# Altium PCB esquema.PcbDoc
Units mil, origin at the board's own origin, x right, y up, seen from the top; angles counter-clockwise.
Board outline 7310 x 1730 mil, 2 copper layers (Top, Bottom), stack 61.811 mil thick; 27 components, 33 nets, 105 pads, 26 vias.
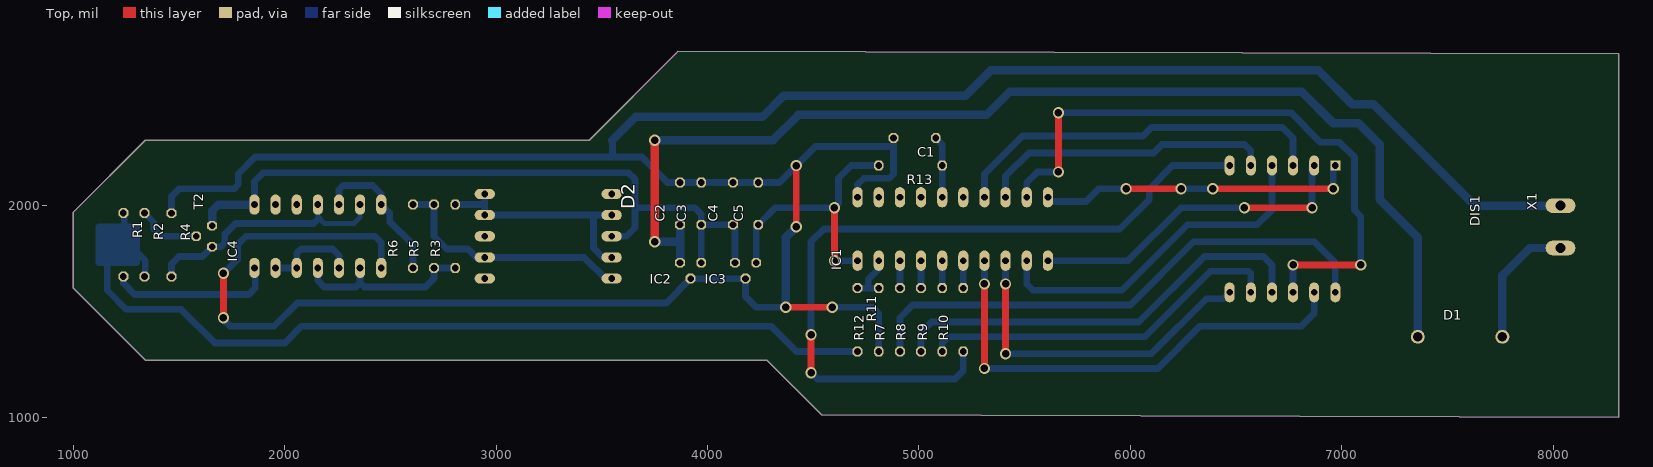
[diagram p0: Top view]
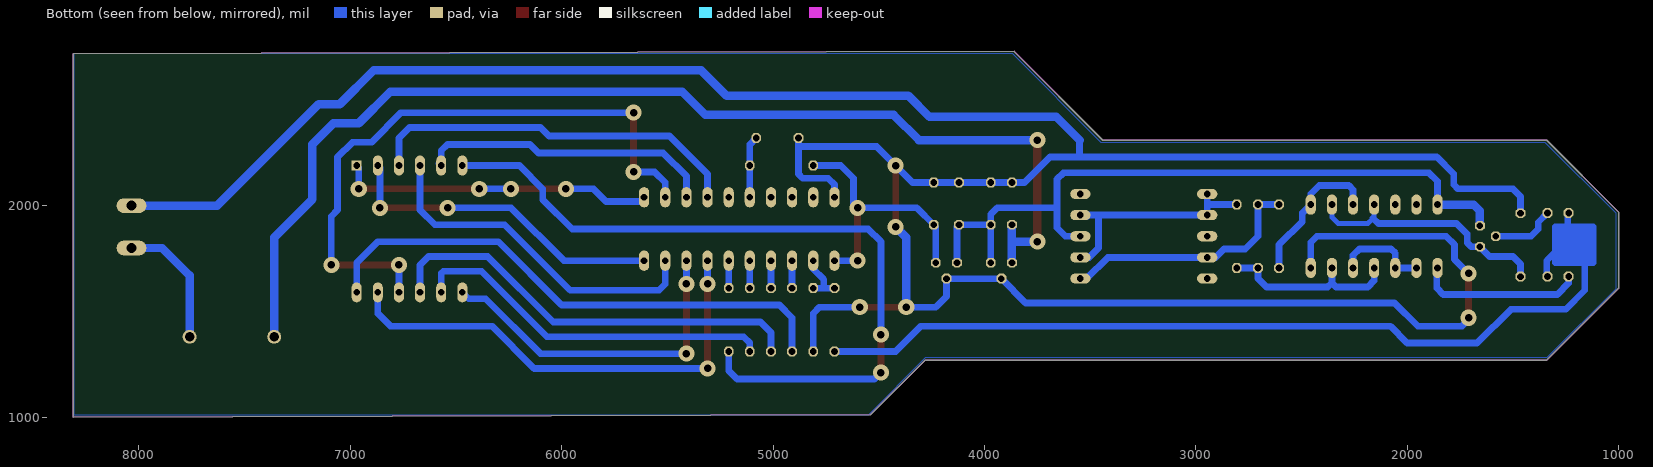
[diagram p1: Bottom view, seen from below]

## Layer stack, top to bottom
Top Solder: solder mask 0.4, Solder Resist, Dk 3.5
Top: signal copper 1.378
Dielectric 1: core 59.0551, FR-4, Dk 4.8
Bottom: signal copper 1.378
Bottom Solder: solder mask 0.4, Solder Resist, Dk 3.5

## Board outline
3860,2730 3440,2310 1340,2310 1000,1970 1000,1610 1340,1270 4280,1270 4540,1010 8310,1000 8310,2720

## Design rules (kind name [scope] priority, off if disabled: settings)
Clearance [All] p1: gap=8 ignorepadtopadclearanceinfootprint=FALSE except(0: SMDPad-SMDPad SMDPad-THPad SMDPad-Via)
Clearance "Clearance (Same Net)" [All] p2: gap=0 ignorepadtopadclearanceinfootprint=FALSE except(8: SMDPad-SMDPad SMDPad-THPad SMDPad-Via)
HoleSize HoleSize_1 [All] p1: absolutevalues=TRUE maxlimit=100000 minlimit=24 maxpercent=80.000 minpercent=20.000
HoleSize [All] p2: absolutevalues=TRUE maxlimit=100 minlimit=1 maxpercent=80.000 minpercent=20.000
HoleToHoleClearance mdViaViaSameLayer [All] p1: gap=8 allowstackedmicrovias=TRUE
HoleToHoleClearance [All] p2: gap=10 allowstackedmicrovias=TRUE
PasteMaskExpansion mlMinCreamFrame [All] p1: expansion=0
PasteMaskExpansion [All] p2: expansion=0
PolygonConnect ThermalVias [IsVia] p1: connectstyle=Direct reliefconductorwidth=10 reliefentries=4 polygonreliefangle="90 Angle" airgapwidth=10
PolygonConnect [All] p2: connectstyle=Relief reliefconductorwidth=10 reliefentries=4 polygonreliefangle="90 Angle" airgapwidth=10
RoutingVias [All] p1: holewidth=28 width=50 viastyle="Through Hole" minholewidth=28 minwidth=50 maxholewidth=28 maxwidth=50
SilkToSilkClearance [All] p1 off: silktosilkclearance=10
SilkToSolderMaskClearance [IsPad] p1 off: minsilkscreentomaskgap=10 clearancetoexposedcopper=TRUE
SolderMaskExpansion mlMinStopFrame [All] p1: expansion=4
SolderMaskExpansion [All] p2: expansion=4
Width Width_1 [All] p1: maxlimit=100000 minlimit=10 preferedwidth=10
Width [All] p2: maxlimit=10 minlimit=10 preferedwidth=10
25 further rules are at their usual default settings.

## Components (designator, comment, footprint, x,y, rotation, side; value= is the part's Value field where it differs from the comment)
C1 "1nF" C050-024X044 4980,2320 r180 top
C2 "0.33uF" C050-024X044 3870,2010 r90 top
C3 "0.1uF" C050-024X044 3970,2010 r90 top
C4 "0.33uF" C050-024X044 4120,2010 r90 top
C5 "0.1uF" C050-024X044 4240,2010 r90 top
D1 "1N4004" DO41-10 7560,1380 r0 top
D2 "" 7SEG-13 3246.3,1855.59 r270 top
DIS1 "NFD-5641BS" NFD-5641 6720,1890 r180 top
IC1 "" SOCKET-20 5160,1890 r0 top
IC2 "78L05Z" TO92#1 3920,1730 r180 top
IC3 "78L33" TO92#1 4180,1730 r180 top
IC4 "74LS04N" DIL14 2156.3,1855.59 r0 top
R1 "1K" 0207/7 1236.3,1815.59 r270 top
R2 "10K" 0207/7 1336.3,1815.59 r270 top
R3 "220" 0207/7 2806.3,1855.59 r90 top
R4 "470" 0207/7 1463.7,1814.41 r270 top
R5 "220" 0207/7 2706.3,1855.59 r90 top
R6 "220" 0207/7 2606.3,1855.59 r90 top
R7 "220" 0207/7 4910,1460 r90 top
R8 "220" 0207/7 5010,1460 r90 top
R9 "220" 0207/7 5110,1460 r90 top
R10 "220" 0207/7 5210,1460 r90 top
R11 "10k" 0207/7 4710,1460 r270 top
R12 "1k" 0207/7 4810,1460 r90 top
R13 "47k" 0207/7 4960,2190 r180 top
T2 "2N3904" TO92#2 1656.3,1855.59 r90 top
X1 "" W237-132 8060,1900 r270 top

## Footprints (in the part's own frame and the unit in brackets; to place one, negate y for a bottom-side part, rotate by r counter-clockwise, add the part's x,y. Pads: shape width x height; smd on the part's side, far side on the other; paste and mask are expansions set on the pad)
7SEG-13 [mil] "7SEG-13"
  oval 48x96 hole 32: 1(-200,-300) 2(-100,-300) 3(0,-300) 4(100,-300) 5(200,-300) 6(200,300) 7(100,300) 8(0,300) 9(-100,300) 10(-200,300)
0207/7 [mil] "0207/7"
  oct 46.48x46.48 hole 32: 1(-150,0) 2(150,0)
C050-024X044 [mil] "C050-024X044"
  oct 46.48x46.48 hole 32: 1(-100,0) 2(100,0)
DIL14 [mil] "DIL14"
  oval 48x96 hole 32: 1(-300,-150) 2(-200,-150) 3(-100,-150) 4(0,-150) 5(100,-150) 6(200,-150) 7(300,-150) 8(300,150) 9(200,150) 10(100,150) 11(0,150) 12(-100,150) 13(-200,150) 14(-300,150)
DO41-10 [mil] "DO41-10"
  round 66 hole 44: A(200,0) C(-200,0)
NFD-5641 [mil] "NFD-5641"
  rect 47.25x47.25 hole 31.5: P$1(-250,-300)
  oval 47.25x94.5 hole 31.5: P$2(-150,-300) P$3(-50,-300) P$4(50,-300) P$5(150,-300) P$6(250,-300) P$7(250,300) P$8(150,300) P$9(50,300) P$10(-50,300) P$11(-150,300) P$12(-250,300)
SOCKET-20 [mil] "SOCKET-20"
  oval 48x96 hole 32: 1(-450,-150) 2(-350,-150) 3(-250,-150) 4(-150,-150) 5(-50,-150) 6(50,-150) 7(150,-150) 8(250,-150) 9(350,-150) 10(450,-150) 11(450,150) 12(350,150) 13(250,150) 14(150,150) 15(50,150) 16(-50,150) 17(-150,150) 18(-250,150) 19(-350,150) 20(-450,150)
TO92#1 [mil] "TO92"
  oct 46.48x46.48 hole 32: 1(-50,0) 2(0,75) 3(50,0)
TO92#2 [mil] "TO92"
  oct 46.48x46.48 hole 32: 1(50,0) 2(0,75) 3(-50,0)
W237-132 [mil] "W237-132"
  oval 70.5x141 hole 47: 1(-100,-25) 2(100,-25)

## Part data
C1 C2 C3 C4 C5: library part C050-024X044
D1: library part DO41-10
D2: library part 7SEG-13
DIS1: library part NFD-5641
IC1: library part SOCKET-20
IC2 IC3 T2: library part TO92
IC4: library part DIL14
R1 R2 R3 R4 R5 R6 R7 R8 R9 R10 R11 R12 R13: library part 0207/7
X1: library part W237-132

## Via types
v1: diameter 53.15/76 (per signal layer), hole 35.43, Top to Bottom, 26 vias

## Nets (pads, with @x,y where several pads share a name; then routed paths per layer and width w, separated by ;. In a path a pad name is that pad's centre, name@x,y a point inside that pad or via, vN(x,y) a via of type N, cw(c..) or ccw(c..) an arc to the next point about the centre after c; other vN are vias at no path point)
+3V3: C5.1 IC1.1 IC3.1 R13.2 | length 1300.4
  Top w32: v1(4600,1740) v1(4600,1990)
  Bottom w32: IC3.1 4230,1900 C5.1 4320,1990 v1(4600,1990) 4620,2010 4620,2130 4680,2190 R13.2 ; v1(4600,1740) IC1.1
GND: C1.2 C2.2 C3.2 C4.2 C5.2 IC1.20 IC2.2 IC3.2 IC4.7 R4.1 R12.1 X1.1 | length 14520.3
  Top w32: v1(1710,1470) v1(1710,1680) ; v1(4370,1520) v1(4590,1520) ; v1(4420,1900) v1(4420,2190)
  Bottom w32: R4.1 1463.7,2043.7 1500,2080 1760,2080 1780,2100 1780,2150 1860,2230 3560,2230 ; v1(1710,1470) 1710,1460 1740,1430 1950,1430 2060,1540 3805,1540 IC2.2 IC3.2 4180,1570 4230,1520 v1(4370,1520) ; v1(1710,1680) 1776.3,1746.3 1776.3,1815.59 1816.3,1855.59 2426.3,1855.59 2456.3,1825.59 IC4.7 ; 3550,2310 3550,2240 3560,2230 ; v1(4590,1520) 4780,1520 4810,1490 R12.1 ; IC1.20 4710,2100 4740,2130 4860,2130 4880,2150 4880,2280 ; C1.2 4880,2280 ; 3560,2230 3690,2230 3810,2110 C2.2 C3.2 C4.2 C5.2 4340,2110 v1(4420,2190) 4510,2280 4880,2280
  Bottom w40: 3550,2310 3660,2420 4260,2420 4360,2520 5220,2520 5340,2640 6890,2640 7050,2480 7150,2480 7630,2000 X1.1 ; v1(4370,1520) 4370,1850 v1(4420,1900)
N$1: C1.1 IC1.16 R13.1 | length 292.4
  Bottom w32: C1.1 5110,2290 R13.1 IC1.16
N$2: IC1.6 R10.2 | length 130
  Bottom w32: R10.2 IC1.6
N$3: IC1.5 R9.2 | length 130
  Bottom w32: R9.2 IC1.5
N$4: IC1.4 R8.2 | length 130
  Bottom w32: R8.2 IC1.4
N$5: IC1.3 R7.2 | length 130
  Bottom w32: R7.2 IC1.3
N$6: IC1.2 R11.1 R12.2 | length 250.7
  Bottom w32: R11.1 4760,1610 ; R12.2 4760,1610 ; IC1.2 4810,1700 4760,1650 4760,1610
N$7: DIS1.P$12 R7.1 | length 2550.5
  Bottom w32: R7.1 4910,1470 4970,1530 6000,1530 6300,1830 6870,1830 6970,1730 DIS1.P$12
N$8: DIS1.P$9 R8.1 | length 2045.7
  Bottom w32: R8.1 5010,1400 5060,1450 6040,1450 6350,1760 6630,1760 6670,1720 DIS1.P$9
N$9: DIS1.P$8 R9.1 | length 1735
  Bottom w32: R9.1 5110,1350 5140,1380 6070,1380 6380,1690 6560,1690 6570,1680 DIS1.P$8
N$10: IC4.1 R1.2 | length 787.4
  Bottom w32: R1.2 1236.3,1633.7 1290,1580 1830,1580 1860,1610 1860,1701.89 IC4.1
N$11: IC4.2 IC4.3 IC4.5 | length 450.7
  Bottom w32: IC4.2 IC4.3 2056.3,1775.59 2076.3,1795.59 2226.3,1795.59 2256.3,1765.59 IC4.5
N$12: IC4.4 IC4.6 R3.1 R5.1 | length 875.6
  Bottom w32: IC4.4 2156.3,1645.59 2186.3,1615.59 2336.3,1615.59 2356.3,1635.59 ; IC4.6 2356.3,1635.59 ; R3.1 R5.1 2706.3,1655.59 2666.3,1615.59 2376.3,1615.59 2356.3,1635.59
N$13: R2.1 T2.2 | length 309.2
  Bottom w32: R2.1 1380,1921.89 1380,1890 1414.41,1855.59 T2.2
N$14: IC4.9 IC4.11 R4.2 T2.3 | length 1215
  Bottom w24: IC4.11 2156.3,1945.59 2161.3,1940.59 2186.3,1915.59 2326.3,1915.59 2356.3,1945.59 IC4.9
  Bottom w32: R4.2 1463.7,1723.7 1500,1760 1610.71,1760 T2.3 1696.3,1805.59 1716.3,1825.59 1716.3,1865.59 1766.3,1915.59 2136.3,1915.59 2161.3,1940.59
N$15: D2.1 D2.2 D2.7 D2.9 R3.2 | length 1116.7
  Bottom w32: R3.2 2940.71,2005.59 2946.3,2000 ; D2.1 2946.3,2000 ; D2.9 3516.3,1955.59 3511.3,1950.59 3506.3,1955.59 3460,1955.59 ; D2.7@3556.3,1755.59 D2.7 3504.41,1755.59 3460,1800 3460,1955.59 ; 2946.3,2000 D2.2 3460,1955.59
N$16: IC4.8 IC4.10 R6.1 | length 707
  Bottom w32: IC4.10 2256.3,2075.59 2276.3,2095.59 2416.3,2095.59 2456.3,2055.59 IC4.8 2496.3,1965.59 2496.3,1925.59 2606.3,1815.59 R6.1
N$17: D2.4 D2.6 R5.2 R6.2 | length 1172.8
  Bottom w32: R6.2 R5.2 2706.3,1855.59 2766.3,1795.59 2866.3,1795.59 2906.3,1755.59 D2.4 3416.3,1755.59 3516.3,1655.59 D2.6
N$18: DIS1.P$6 R10.1 | length 3617.4
  Top w32: v1(4490,1210) v1(4490,1390)
  Bottom w32: v1(4490,1210) 4520,1180 5170,1180 5210,1220 R10.1 ; v1(4490,1390) 4490,1830 4550,1890 5950,1890 6090,2030 6090,2080 6200,2190 DIS1.P$6
N$19: DIS1.P$11 IC1.7 | length 2277.7
  Top w32: v1(5310,1230) v1(5310,1630)
  Bottom w32: v1(5310,1230) 6130,1230 6330,1430 6810,1430 6870,1490 DIS1.P$11 ; v1(5310,1630) IC1.7
N$20: DIS1.P$7 IC1.8 | length 1620.1
  Top w32: v1(5410,1300) v1(5410,1630)
  Bottom w32: v1(5410,1300) 6100,1300 6360,1560 6440,1560 DIS1.P$7 ; v1(5410,1630) IC1.8
N$21: DIS1.P$4 IC1.9 | length 1649.8
  Bottom w32: IC1.9 5510,1630 5540,1600 5960,1600 6270,1910 6600,1910 6670,1980 DIS1.P$4
N$22: DIS1.P$2 IC1.10 | length 1557.7
  Top w32: v1(6540,1990) v1(6860,1990)
  Bottom w32: IC1.10 5990,1740 6240,1990 v1(6540,1990) ; v1(6860,1990) 6860,2180 DIS1.P$2
N$23: DIS1.P$1 IC1.11 | length 1497.3
  Top w32: v1(5980,2080) v1(6240,2080) ; v1(6390,2080) v1(6960,2080)
  Bottom w32: IC1.11 5630,2020 5790,2020 5850,2080 v1(5980,2080) ; v1(6240,2080) v1(6390,2080) ; v1(6960,2080) 6960,2180 DIS1.P$1
N$24: DIS1.P$10 IC1.12 | length 2980.1
  Top w32: v1(5660,2160) v1(5660,2440) ; v1(6770,1720) v1(7090,1720)
  Bottom w32: IC1.12 5510,2110 5560,2160 v1(5660,2160) ; v1(5660,2440) 6760,2440 6900,2300 6990,2300 7060,2230 7060,1980 7090,1950 v1(7090,1720) ; DIS1.P$10 v1(6770,1720)
N$25: DIS1.P$5 IC1.13 | length 1418.7
  Bottom w32: IC1.13 5410,2140 5520,2250 6110,2250 6150,2290 6540,2290 6570,2260 DIS1.P$5 DIS1.P$5@6580,2200
N$26: DIS1.P$3 IC1.14 | length 1811.8
  Bottom w32: IC1.14 5310,2150 5490,2330 6060,2330 6100,2370 6720,2370 6770,2320 DIS1.P$3
N$27: D1.A X1.2 | length 618.8
  Bottom w40: D1.A 7760,1670 7890,1800 X1.2
N$28: C2.1 D1.C IC2.3 | length 5393.4
  Top w40: v1(3750,1830) v1(3750,2310)
  Bottom w40: v1(3750,1830) 3870,1830 ; v1(3750,2310) 4310,2310 4430,2430 5320,2430 5430,2540 6810,2540 6960,2390 7080,2390 7180,2290 7180,2030 7360,1850 D1.C ; IC2.3 3870,1830 ; C2.1 3870,1830
N$29: 
PUNTA: R1.1 R2.2 R11.2 | length 5943.1
  Bottom w32: 1210,1820 1230,1820 ; 1230,1790 1230,1800 ; R1.1 1240,1965.59 1240,1900 1120,1900 1120,1730 1300,1730 1300,1900 1150,1900 1150,1750 1180,1750 ; R2.2 1340,1669.29 1340,1740 1260,1820 1230,1820 ; R11.2 4420,1310 4300,1430 2080,1430 2000,1350 1670,1350 1510,1510 1250,1510 1160,1600 1160,1730 1180,1750 ; 1180,1750 1280,1750 1280,1870 1170,1870 1170,1770 1250,1770 1250,1850 1190,1850 1190,1800 1230,1800 ; 1230,1800 1230,1820
VCC: C3.1 C4.1 D2.8 IC2.1 IC3.3 IC4.14 T2.1 | length 3468.3
  Bottom w32: IC4.14 1856.3,2115.59 1896.3,2155.59 3626.3,2155.59 3656.3,2125.59 3656.3,1990 ; D2.8 3616.3,1855.59 3656.3,1895.59 3656.3,1990 ; IC2.1 C3.1 ; IC3.3 4130,1900 C4.1 C3.1 ; 3656.3,1990 3940,1990 3970,1960 C3.1
  Bottom w40: T2.1 1656.3,1975.59 1686.3,2005.59 IC4.14
pads on no net: D2.3 D2.5 D2.10 IC1.15 IC1.17 IC1.18 IC1.19 IC4.12 IC4.13

## Polygon pours and split planes (outlines as drawn)
N$29 on Bottom "Bottom-N$29" (solid, remove dead copper, pour order 0): 1012,1963.31 1346.69,2298 3446.69,2298 3866.69,2718 8308,2718 8308,1012 4546.69,1012 4276.69,1282 1336.69,1282 1012,1606.69

## Keep-outs
Keep-Out Layer:
  the board outline again, w0

## Silkscreen, mask and mechanical layers (free items; w line width, h text height)
Dimension:
  the board outline again, w0

## Text inside footprints (layer, text, board x,y; h text height)
T2: Assembly Top "1" at 1656.3,1900.59 h77.5 r90; Assembly Top "3" at 1656.3,1770.59 h77.5 r90; Assembly Top "2" at 1631.3,1830.59 h77.5 r90
X1: Assembly Top "2" at 8157.83,1839.95 h77.5 r90; Assembly Top "1" at 8159.83,2056.72 h77.5 r90